# Altium PCB PCB4.PcbDoc
Units mil, origin at the board's own origin, x right, y up, seen from the top; angles counter-clockwise.
Board outline 3935 x 3910 mil, 2 copper layers (Top Layer, Bottom Layer); 36 components, 33 nets, 118 pads, 18 vias.
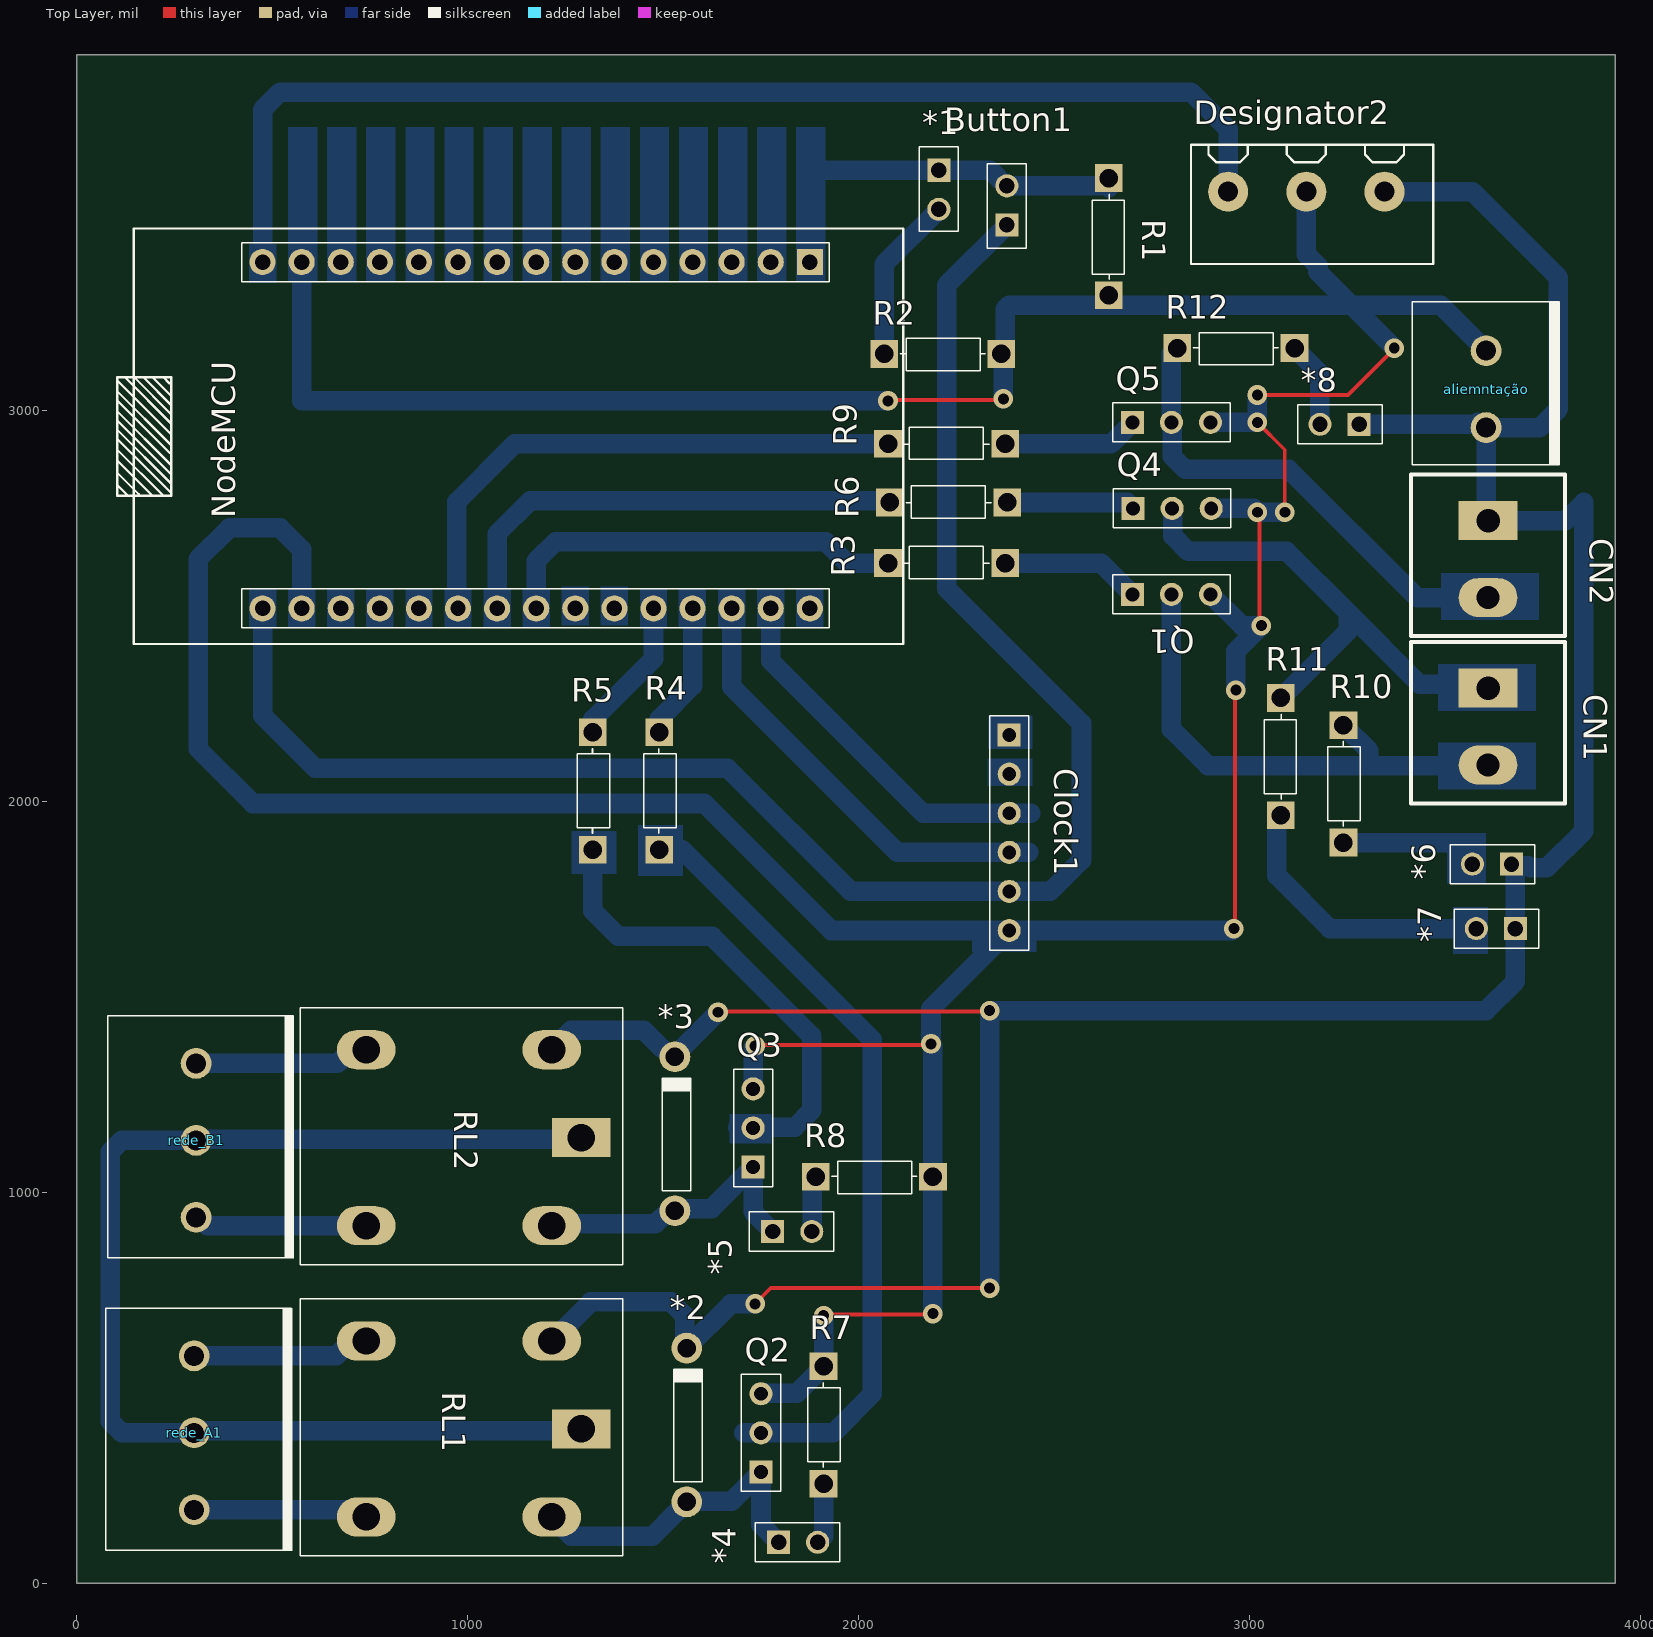
[diagram p0: Top Layer view]
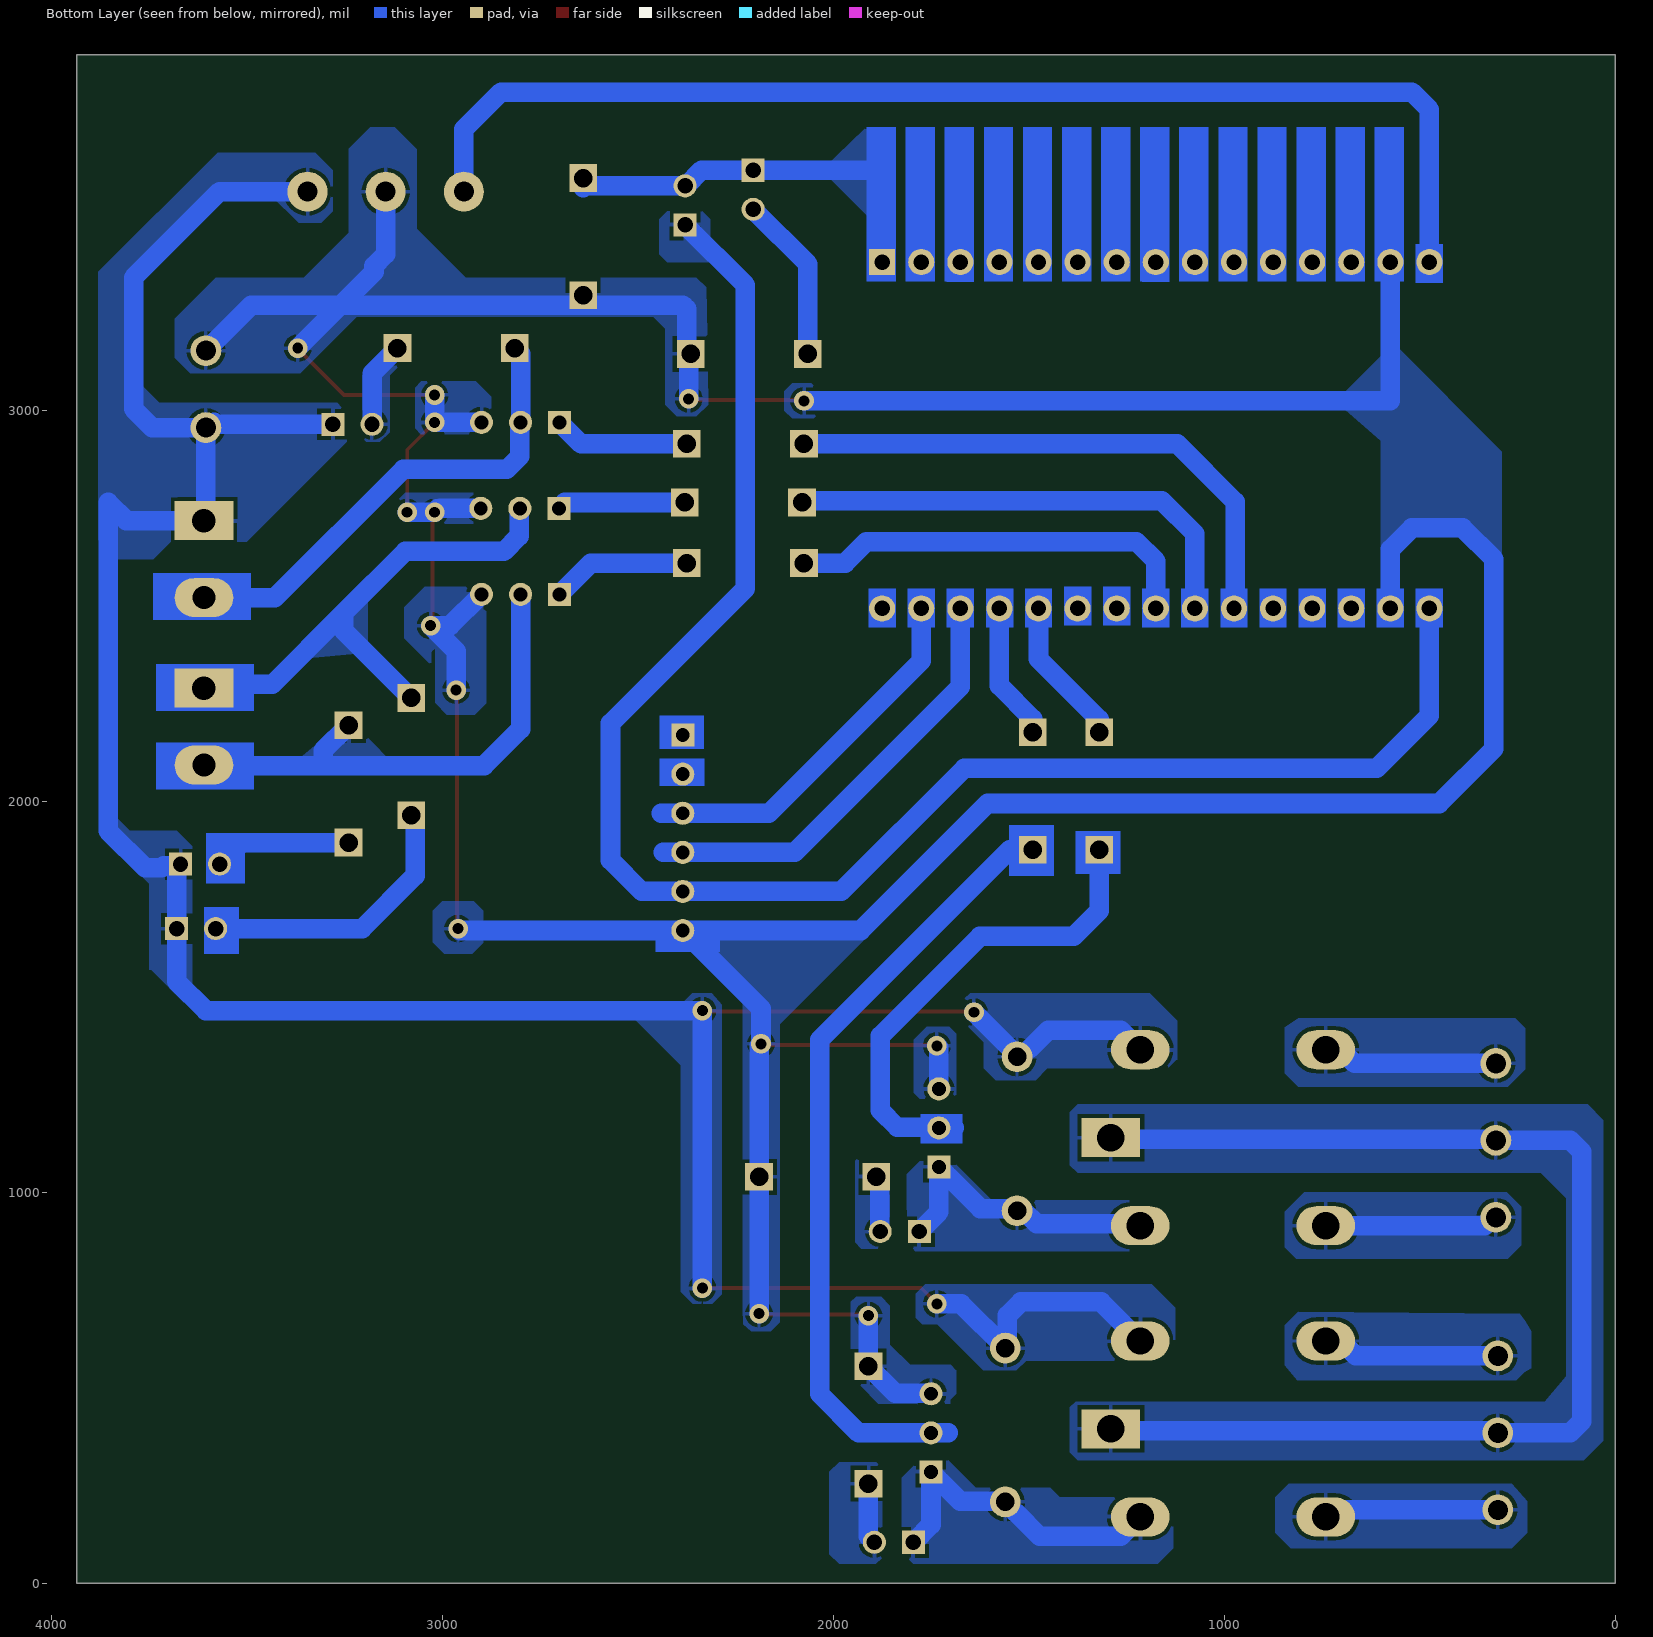
[diagram p1: Bottom Layer view, seen from below]
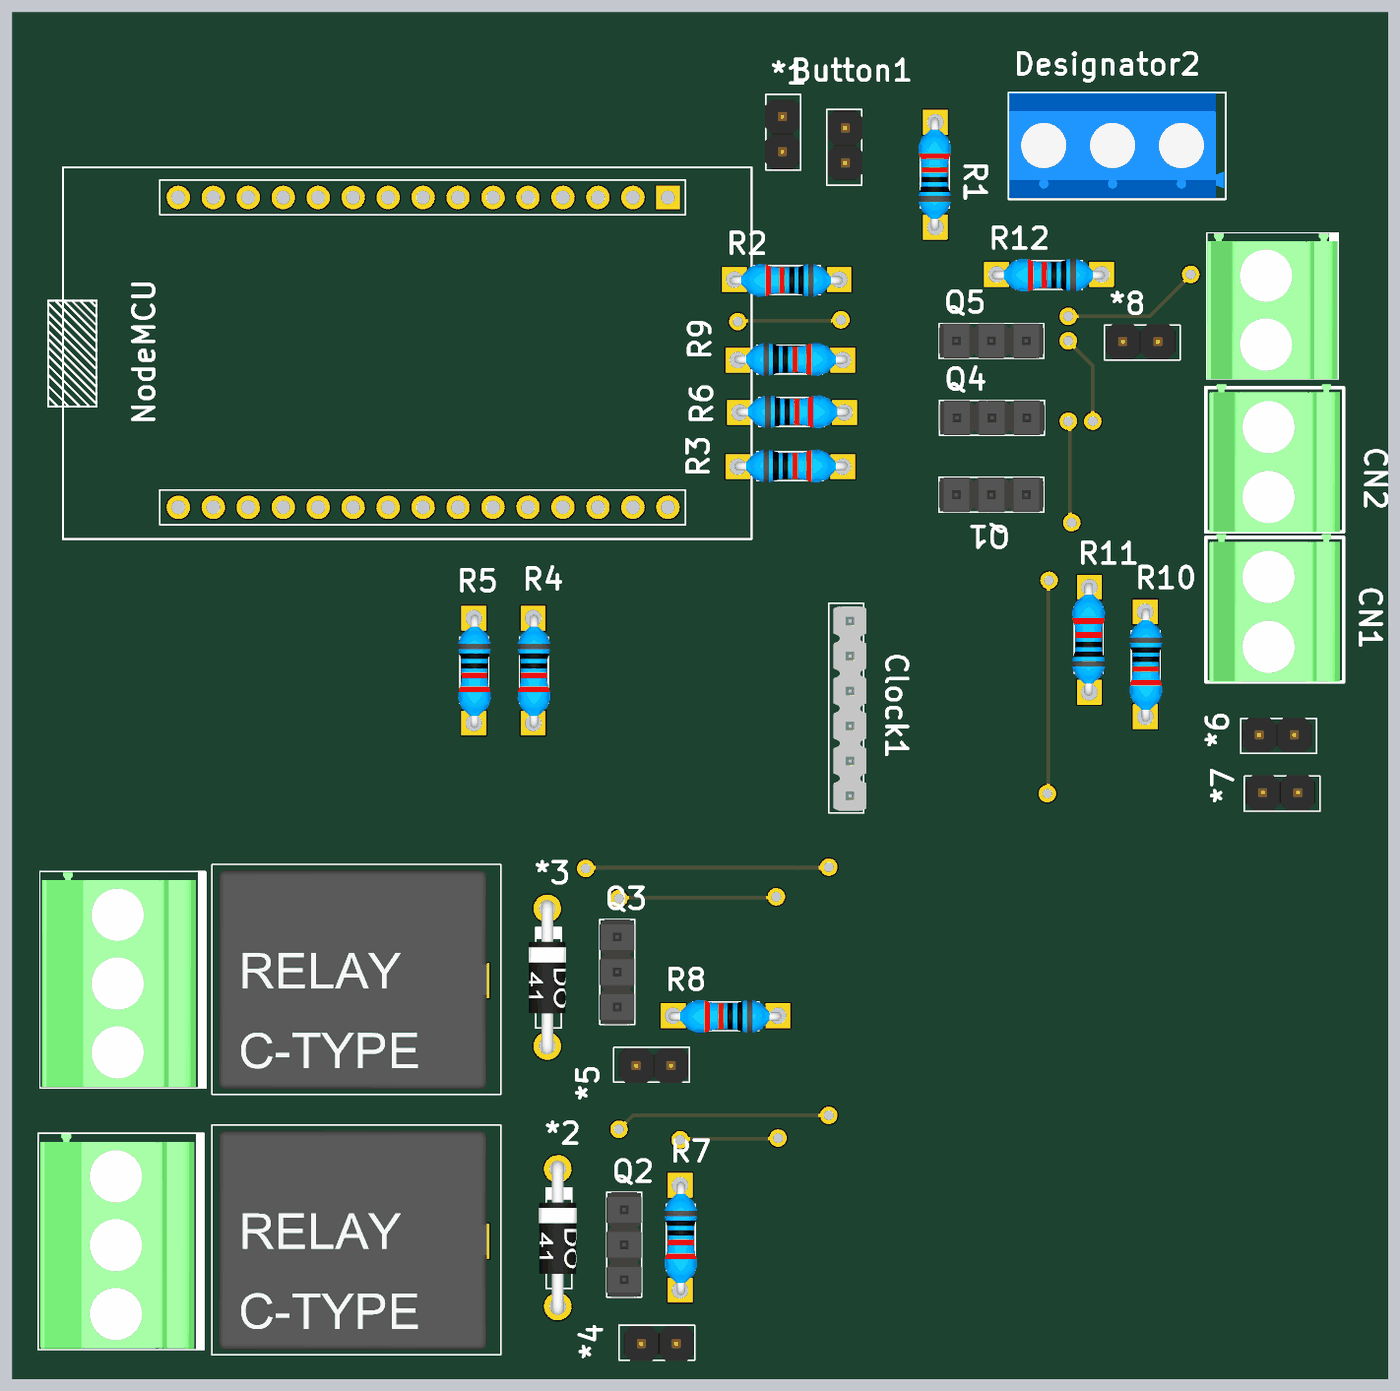
[diagram p2: 3D render of the assembled board from above, using the file's embedded part models]

## Layer stack, top to bottom
Top Solder: solder mask 0.4, Solder Resist, Dk 3.5
Top Layer: signal copper 1.4
Dielectric 1: dielectric 12.6, FR-4, Dk 4.8
Bottom Layer: signal copper 1.4
Bottom Solder: solder mask 0.4, Solder Resist, Dk 3.5

## Board outline
0,0 3935,0 3935,3910 0,3910

## Design rules (kind name [scope] priority, off if disabled: settings)
Clearance [All] p1: gap=10 ignorepadtopadclearanceinfootprint=FALSE except(0: Arc-Hole Track-Hole SMDPad-Hole THPad-Hole Via-Hole Fill-Hole Poly-Hole Region-Hole Text-Hole)
PolygonConnect [All] p1: connectstyle=Relief reliefconductorwidth=10 reliefentries=4 polygonreliefangle="90 Angle" airgapwidth=10
RoutingVias [All] p1: holewidth=28 width=50 viastyle="Through Hole" minholewidth=28 minwidth=50 maxholewidth=28 maxwidth=50
SolderMaskExpansion [All] p1: expansion=4
Width [All] p1: maxlimit=60 minlimit=10 preferedwidth=50 toplayer_maxwidth=10 toplayer_prefwidth=10 bottomlayer_minwidth=45 minimp=50.000000 maximp=50.000000 favimp=50.000000
30 further rules are at their usual default settings.

## Classes and differential pairs
component class "Relógio digital": Clock1
component class "Relay de carga": *2 *3 *4 *5 Q2 Q3 R4 R5 R7 R8 rede_A1 rede_B1 RL1 RL2
component class "Microcontrolador ESP8266": aliemntação NodeMCU
component class "Fita LED": *6 *7 *8 CN1 CN2 Q1 Q4 Q5 R3 R6 R9 R10 R11 R12
component class Botão: *1 Button1 R1 R2

## Components (designator, comment, footprint, x,y, rotation, side; value= is the part's Value field where it differs from the comment)
*1 "LED_AXIAL_5MM" HEADER_1X2 2205,3565 r270 top value=?
*2 "DIO_PTH_1N4007" DIO_PTH_DO41 1560,405 r270 top value=?
*3 "DIO_PTH_1N4007" DIO_PTH_DO41 1530,1150 r270 top value=?
*4 "LED_AXIAL_5MM" HEADER_1X2 1845,105 r0 top value=?
*5 "LED_AXIAL_5MM" HEADER_1X2 1830,900 r0 top value=?
*6 "LED_AXIAL_5MM" HEADER_1X2 3620,1840 r180 top value=?
*7 "LED_AXIAL_5MM" HEADER_1X2 3630,1675 r180 top value=?
*8 "LED_AXIAL_5MM" HEADER_1X2 3230,2965 r180 top value=?
aliemntação "?" CN_KRE_2 3605,3055 r90 top
Button1 "?" HEADER_1X2 2379.14,3525 r90 top
Clock1 "HEADER_1X6" HEADER_1X6 2385,1920 r270 top value=?
CN1 "MKDS" MKDSN02 3610,2191.57 r270 top
CN2 "MKDS" MKDSN02 3610,2620 r270 top
Designator2 "Comment" "KF301 3P" 3145,3560 r180 top
NodeMCU "ESP8266 Development kit" DIV_NodeMCU_Socket 142.57,3470.95 r270 top
Q1 "NPN" HEADER_1X3 2800,2580 r0 top
Q2 "NPN" HEADER_1X3 1700,385 r90 top
Q3 "NPN" HEADER_1X3 1680,1165 r90 top
Q4 "NPN" HEADER_1X3 2801.73,2800 r0 top
Q5 "NPN" HEADER_1X3 2800,3020 r0 top
R1 "1M" RES_PTH_7.62MM 2640,3445 r90 top
R2 "" RES_PTH_7.62MM 2215,3145 r180 top value=330
R3 "10k" RES_PTH_7.62MM 2225,2610 r0 top
R4 "10k" RES_PTH_7.62MM 1490,2026.85 r270 top
R5 "10k" RES_PTH_7.62MM 1320,2026.85 r270 top
R6 "10k" RES_PTH_7.62MM 2230,2765 r0 top
R7 "330" RES_PTH_7.62MM 1910,405 r270 top
R8 "330" RES_PTH_7.62MM 2040,1040 r180 top
R9 "10k" RES_PTH_7.62MM 2225,2915 r0 top
R10 "330" RES_PTH_7.62MM 3240,2045 r270 top
R11 "330" RES_PTH_7.62MM 3080,2115 r90 top
R12 "330" RES_PTH_7.62MM 2965,3160 r180 top
rede_A1 "?" CN_KRE_3 300,385 r90 top
rede_B1 "?" CN_KRE_3 305,1133.15 r90 top
RL1 "RELEICR5551" DIV_RELE_5551 1015,395 r0 top
RL2 "RELEICR5551" DIV_RELE_5551 1015,1140 r0 top

## Footprints (in the part's own frame and the unit in brackets; to place one, negate y for a bottom-side part, rotate by r counter-clockwise, add the part's x,y. Pads: shape width x height; smd on the part's side, far side on the other; paste and mask are expansions set on the pad)
CN_KRE_2 [mm]
  round 2 hole 1.3: 1(-2.5,0) 2(2.5,0)
  silkscreen extent -4.93,-4.75 5.69,4.8, body extent -4.93,-4.7 5.64,4.8, height 15
CN_KRE_3 [mm]
  round 2 hole 1.3: 1(-5,0) 2(0,0) 3(5,0)
  silkscreen extent -7.67,-6.38 8.1,5.74, body extent -7.53,-5.61 8.04,5.59, height 18
DIO_PTH_DO41 [mm]
  round 2 hole 1.2: A(5,0) K(-5,0)
  silkscreen extent -3.62,-0.86 3.69,1.02, body extent -5.65,-1.36 5.71,1.36, height 1.36
DIV_NodeMCU_Socket [mm]
  rect 1.7x1.7 hole 1: 1(2.31,44.004)
  round 1.7 hole 1: 2(2.31,41.464) 3(2.31,38.924) 4(2.31,36.384) 5(2.31,33.844) 6(2.31,31.304) 7(2.31,28.764) 8(2.31,26.224) 9(2.31,23.684) 10(2.31,21.144) 11(2.31,18.604) 12(2.31,16.064) 13(2.31,13.524) 14(2.31,10.984) 15(2.31,8.444) 16(24.816,8.444) 17(24.816,10.984) 18(24.816,13.524) 19(24.816,16.064) 20(24.816,18.604) 21(24.816,21.144) 22(24.816,23.684) 23(24.816,26.224) 24(24.816,28.764) 25(24.816,31.304) 26(24.816,33.844) 27(24.816,36.384) 28(24.816,38.924) 29(24.816,41.464) 30(24.816,44.004)
  silkscreen extent 0.13,-1 27.13,50.08
DIV_RELE_5551 [mil]
  rect 150x100 hole 70: 1(275,0)
  oval 150x100 hole 70: 2(-275,-225) 3(-275,225) 4(200,225) 5(200,-225)
  silkscreen extent -444,-325 382,333, body extent -425,-310 343,316, height 87
HEADER_1X2 [mm]
  rect 1.5x1.5 hole 1: 1(-1.27,0)
  round 1.5 hole 1: 2(1.27,0)
  silkscreen extent -2.79,-1.27 2.71,1.27, body extent -2.44,-1.34 2.64,1.2, height 8.5
HEADER_1X3 [mm] "Connector; Header; 3x2 Position"
  rect 1.5x1.5 hole 0.9: 1(-2.54,-1.27)
  round 1.5 hole 0.9: 2(0,-1.27) 3(2.54,-1.27)
  silkscreen extent -3.81,-2.54 3.81,0, body extent -3.81,-2.54 3.81,0, height 9.5
HEADER_1X6 [mm] "Connector; Header; 6 Position"
  rect 1.5x1.5 hole 0.9: 1(-6.35,0)
  round 1.5 hole 0.9: 2(-3.81,0) 3(-1.27,0) 4(1.27,0) 5(3.81,0) 6(6.35,0)
  silkscreen extent -7.62,-1.27 7.62,1.27, body extent -7.38,-3.55 7.46,1.48, height 8.56
"KF301 3P" [mm] "3 Position Wire to Board Terminal Block Horizontal with Board 0.200\" (5.08mm) Through Hole"
  round 2.6 hole 1.3: 1(-5.08,0) 2(0,0) 3(5.08,0)
  silkscreen extent -8.25,-3.05 7.49,4.7, body extent -8.14,-3 7.46,4.6, height 10
MKDSN02 [mm]
  rect 2.54x3.81 hole 1.524: 1(-2.5,0)
  oval 2.54x3.81 hole 1.5: 2(2.5,0)
  silkscreen extent -5.5,-5 5,5, body extent -5.74,-4.74 5,4.76, height 15
RES_PTH_7.62MM [mm]
  rect 1.8x1.8 hole 1.2: 1(-3.81,0) 2(3.81,0)
  silkscreen extent -2.76,-1.01 2.76,1.09, body extent -4.06,-1.15 4.16,1.25, height 3.2

## Part data
aliemntação: library part CN_MKDS_2, "MKDS_2"
Button1: library part HEADER_1X2, "1X2"
Clock1: "1X6"
CN1 CN2: library part CN_2, Digikey=277-5893-ND
NodeMCU: library part NodeMCU, Reference=https://bennthomsen.files.wordpress.com/2015/12/nodemcu_pinout_700-2.png, Schematic=https://raw.githubusercontent.com/nodemcu/nodemcu-devkit/master/Documents/NODEMCU_DEVKIT_SCH.png
Q1 Q2 Q3 Q4 Q5: "NPN Bipolar Transistor", Code_JEDEC=TO-226-AA, LatestRevisionDate=17-Jul-2002, LatestRevisionNote="Re-released for DXP Platform.", PackageDescription="TO, Flat Index; 3 In-Line, Axial Leads; Body Dia. 4.8mm; Leads 0.55 x 0.51 mm (max)", PackageReference=TO-226-AA, Published=8-Jun-2000, Publisher="Altium Limited"
R1 R2 R3 R4 R5 R6 R7 R8 R9 R10 R11 R12: library part RES_PTH_7.62MM, "Pin Through Hole Resistor 7.62mm"
rede_A1 rede_B1: library part CN_MKDS_3, "MKDS_3"

## Via types
v1: diameter 50, hole 28, Top Layer to Bottom Layer, 18 vias

## Nets (pads, with @x,y where several pads share a name; then routed paths per layer and width w, separated by ;. In a path a pad name is that pad's centre, name@x,y a point inside that pad or via, vN(x,y) a via of type N, cw(c..) or ccw(c..) an arc to the next point about the centre after c; other vN are vias at no path point)
+3v3: Button1.1 Clock1.5 NodeMCU.16 | length 4420.2
  Bottom Layer w50: NodeMCU.16 475,2220 610,2085 1665,2085 1980,1770 Clock1.5 2490,1770 2570,1850 2570,2200 2225,2545 2225,3320.86 Button1.1
+12: *2.K *3.K *6.1 *7.1 *8.1 aliemntação.1 CN2.1 Designator2.1 RL1.4 RL2.4 | length 7882.7
  Top Layer w10: v1(1640,1460.93) 1642.04,1462.96 2332.96,1462.96 v1(2335,1465) ; v1(1735,715) 1775,755 v1(2335,755)
  Bottom Layer w50: RL1.4 1315,720 1520,720 1554.5,685.5 1554.5,607.35 *2.K 1673.15,715 v1(1735,715) ; RL2.4 1265,1415 1450,1415 1496.57,1368.43 ; *3.K 1530,1350.93 v1(1640,1460.93) ; v1(2335,755) v1(2335,1465) 3605,1465 3680,1540 *7.1 3680,1830 *6.1@3674.53,1835.47 ; *8.1 aliemntação.1@3588.8,2965 ; Designator2.1 3570,3560 3790,3340 3790,3004.29 3742.29,2956.57 aliemntação.1 ; aliemntação.1@3583.8,2970 aliemntação.1@3588.8,2965 ; aliemntação.1@3605,2965 aliemntação.1@3588.8,2965 ; *6.1 *6.1@3674.53,1835.47 ; aliemntação.1@3588.8,2965 3597.22,2956.57 aliemntação.1 ; aliemntação.1 3605,2723.43 CN2.1 3808.43,2718.43 3855,2765 3855,1925 3760,1830 3718.58,1830 3713.11,1835.47 *6.1@3674.53,1835.47
GND: aliemntação.2 Clock1.6 Designator2.2 NodeMCU.14 NodeMCU.17 Q1.3 Q2.3 Q3.3 Q4.3 Q5.3 R1.1 R2.1 R7.1 R8.1 | length 12576.6
  Top Layer w10: v1(1735,1375) 1737.5,1377.5 2182.5,1377.5 v1(2185,1380) ; v1(1910,685) 1912.5,687.5 2187.5,687.5 v1(2190,690) ; v1(2075,3025) 2077.5,3027.5 2367.5,3027.5 v1(2370,3030) ; v1(2960,1675) 2962.5,1677.5 2962.5,2282.5 v1(2965,2285) ; v1(3020,2740) 3025,2735 3025,2455 v1(3030,2450) ; v1(3020,2970) 3090,2900 v1(3090,2740) ; v1(3020,3040) 3251.9,3040 3365.32,3153.43 3365.32,3155.32 v1(3370,3160)
  Bottom Layer w45: aliemntação.2@3599.38,3159.04 aliemntação.2
  Bottom Layer w50: NodeMCU.17 575,2645 520,2700 390,2700 310,2620 310,2135 450,1995 1605,1995 1930,1670 Clock1.6 ; 575,3455 NodeMCU.14 575,3025 v1(2075,3025) ; Q3.3 1730,1370 v1(1735,1375) ; Q2.3@1748.27,486.73 Q2.3 1751.73,486.73 1841.73,486.73 R7.1 v1(1910,685) ; v1(2190,690) R8.1 2190,1375 v1(2185,1380) 2185,1470 Clock1.6 ; v1(2370,3030) 2370,3140 R2.1 2375,3155 2375,3260 2385,3270 3260,3270 ; Q1.3 2980,2450 v1(3030,2450) 2965,2385 v1(2965,2285) ; Q5.3 v1(3020,2970) v1(3020,3040) ; Q4.3 3010,2750 v1(3020,2740) v1(3090,2740) ; v1(2960,1675) 2955,1670 Clock1.6 ; Designator2.2 3145,3400 3175,3370 3175,3355 3260,3270 ; v1(3370,3160) 3260,3270 ; aliemntação.2@3599.38,3159.04 3488.43,3270 3260,3270
Net*1_A: *1.1 Button1.2 NodeMCU.1 R1.2 | length 1009.9
  Bottom Layer w50: NodeMCU.1 1875,3600 1890,3615 *1.1 2336.69,3615 2376.69,3575 Button1.2 2635,3575 R1.2@2640,3570
Net*1_K: *1.2 R2.2 | length 435.1
  Bottom Layer w50: R2.2@2060,3150 R2.2 2065,3375 *1.2
Net*2_A: *2.A *4.1 Q2.1 RL1.5 | length 786
  Bottom Layer w50: RL1.5 1265,120 1471.85,120 *2.A@1534.07,182.22 ; *2.A 1561.61,209.76 1674.76,209.76 Q2.1 1750,150 *4.1
Net*3_A: *3.A *5.1 Q3.1 RL2.5 | length 762.8
  Bottom Layer w50: RL2.5 1253.53,915 1258.53,920 1480,920 1513.15,953.15 *3.A 1535.5,958.65 1623.65,958.65 Q3.1 1730,950 *5.1
Net*4_K: *4.2 R7.2 | length 156.2
  Bottom Layer w50: *4.2 1910,120 R7.2
Net*5_K: *5.2 R8.2 | length 144.1
  Bottom Layer w50: *5.2 1881.73,901.73 1881.73,1031.73 R8.2
Net*6_K: *6.2 R10.2 | length 352.8
  Bottom Layer w50: R10.2 3512.55,1895 3567.55,1840 *6.2
Net*7_K: *7.2 R11.1 | length 725.4
  Bottom Layer w50: R11.1 3069.57,1954.57 3069.57,1810.43 3205,1675 *7.2
Net*8_K: *8.2 R12.1 | length 221.9
  Bottom Layer w50: R12.1 3120,3155 3180,3095 *8.2
NetClock1_3: Clock1.3 NodeMCU.29 | length 960.5
  Bottom Layer w50: NodeMCU.29 1775,2360 2165,1970 Clock1.3 2440,1970
NetClock1_4: Clock1.4 NodeMCU.28 | length 1135.6
  Bottom Layer w50: NodeMCU.28 1675,2293.94 2098.94,1870 Clock1.4 2435,1870
NetCN1_1: CN1.1 Q4.2 R11.2 | length 1237.3
  Bottom Layer w50: Q4.2 2803.47,2748.27 2803.47,2679.29 2842.75,2640 3095,2640 3252.5,2482.5 ; R11.2 3252.5,2437.5 3252.5,2482.5 ; 3523.3,2300 3435,2300 3252.5,2482.5
NetCN1_2: CN1.2 Q1.2 R10.1 | length 1335.7
  Bottom Layer w50: Q1.2 2800,2185 2893.43,2091.57 3305,2091.57 ; R10.1@3248.27,2203.27 R10.1 3305,2130 3305,2091.57 ; CN1.2@3610,2091.57 3305,2091.57
NetCN2_2: CN2.2 Q5.2 R12.2 | length 1241.7
  Bottom Layer w50: R12.2 2800,3145 Q5.2 2801.73,2968.27 2801.73,2883.27 2835,2850 3100,2850 3428.43,2521.57 CN2.2
Netesp_VCC_1: Designator2.3 NodeMCU.15 | length 3082.6
  Bottom Layer w50: NodeMCU.15@478.24,3376.76 NodeMCU.15 475,3770 520,3815 2850,3815 2945,3720 Designator2.3
NetNodeMCU_21: NodeMCU.21 R9.1 | length 1438.8
  Bottom Layer w50: NodeMCU.21 971.76,2497.19 971.76,2766.76 1120,2915 R9.1
NetNodeMCU_22: NodeMCU.22 R6.1 | length 1233.3
  Bottom Layer w50: NodeMCU.22 1075,2685 1160,2770 2075,2770 R6.1
NetNodeMCU_23: NodeMCU.23 R3.1 | length 1064.5
  Bottom Layer w50: NodeMCU.23 1175,2615 1225,2665 1915,2665 1970,2610 R3.1
NetNodeMCU_26: NodeMCU.26 R5.1 | length 381.3
  Bottom Layer w50: R5.1 1320,2210 1475,2365 NodeMCU.26
NetNodeMCU_27: NodeMCU.27 R4.1 | length 352.3
  Bottom Layer w50: R4.1 1490,2211.54 1575,2296.54 NodeMCU.27
NetQ1_2: Q1.1 R3.2 | length 358.7
  Bottom Layer w50: R3.2@2375.43,2609.57 R3.2 2620,2610 Q1.1
NetQ2_2: Q2.2 R4.2 | length 2022.8
  Bottom Layer w50: R4.2 1548.47,1876.85 2035,1390.32 2035,485 1935,385 Q2.2 1705.47,385
NetQ3_2: Q3.2 R5.2 | length 1246.9
  Bottom Layer w50: R5.2 1320,1720 1385,1655 1625,1655 1879.43,1400.57 1879.43,1209.75 1836.41,1166.73 1731.73,1166.73 Q3.2 1690.47,1165
NetQ4_2: Q4.1 R6.2 | length 327.9
  Bottom Layer w50: R6.2 2686.73,2765 Q4.1
NetQ5_2: Q5.1 R9.2 | length 347.8
  Bottom Layer w50: R9.2 2645,2915 Q5.1
Netrede_A1_1: rede_A1.1 RL1.2 | length 447.5
  Bottom Layer w50: rede_A1.1 683.32,188.15 701.47,170 RL1.2
Netrede_A1_2: rede_A1.2 rede_B1.2 RL1.1 RL2.1 | length 3130.4
  Bottom Layer w50: RL1.1 1285,390 305,390 rede_A1.2 115,385 85,415 85,1103.86 114.29,1133.15 rede_B1.2 308.43,1136.57 1286.57,1136.57 RL2.1
Netrede_A1_3: rede_A1.3 RL1.3 | length 455.8
  Bottom Layer w50: rede_A1.3 663.32,581.85 701.47,620 RL1.3
Netrede_B1_1: rede_B1.1 RL2.2 | length 443.8
  Bottom Layer w50: rede_B1.1 312.78,936.3 334.08,915 RL2.2
Netrede_B1_3: rede_B1.3 RL2.3 | length 449.5
  Bottom Layer w50: rede_B1.3 666.47,1330 701.47,1365 RL2.3
pads on no net: Clock1.1 Clock1.2 NodeMCU.2 NodeMCU.3 NodeMCU.4 NodeMCU.5 NodeMCU.6 NodeMCU.7 NodeMCU.8 NodeMCU.9 NodeMCU.10 NodeMCU.11 NodeMCU.12 NodeMCU.13 NodeMCU.18 NodeMCU.19 NodeMCU.20 NodeMCU.24 NodeMCU.25 NodeMCU.30

## Polygon pours and split planes (outlines as drawn)
GND on Bottom Layer "Bottom Layer-GND" (solid, remove dead copper, pour order 114): 2890.6,3290.6 3065.04,3465.04 3065.04,3668.07 3121.97,3725 3185,3725 3240,3670 3240,3455 3439.55,3255.45
+12 on Bottom Layer "+12_L02_P112" (solid, pour order 112): 3700,2995.9 3790,3085.9 3790,3340 3580,3550 3437.62,3550 3367.62,3480 3310,3480 3280,3510 3280,3615 3325,3660 3575,3660 3880,3355 3880,2670 3830,2620 3740,2620 3665,2695
no net on Bottom Layer "Bottom Layer-No Net 14" (solid, pour order 108): 3140,3555
Net*1_A on Bottom Layer "NET*1_A_L02_P106" (solid, remove dead copper, pour order 106): 1895,3480 2030,3615 1915,3725
no net on Bottom Layer "Bottom Layer-No Net 15" (solid, pour order 104): 725,3445
no net on Bottom Layer "Bottom Layer-No Net 16" (solid, pour order 102): 620,3640
NetCN1_2 on Bottom Layer "Bottom Layer-NetCN1_2" (solid, pour order 98): 3245,2210 3238.43,2210 3123.43,2095 3385,2095
no net on Bottom Layer "Bottom Layer-No Net 12" (solid, pour order 94): 3155,2085
NetCN1_1 on Bottom Layer "NETCN1_1_L02_P092" (solid, pour order 92): 3190.32,2380 3359.04,2365 3364.04,2370 3190.32,2543.72
+12 on Bottom Layer "+12_L02_P090" (solid, pour order 90): 3640,1505 3640,1885 3680,1925 3800,1925 3840,1965 3875,1930 3875,1915 3750,1790 3750,1570 3745,1570 3685,1510 3674.53,1510
+12 on Bottom Layer "+12_L02_P088" (solid, pour order 88): 2340,1275.32 2526.31,1461.63 2368.37,1461.63
+12 on Bottom Layer "+12_L02_P086" (solid, pour order 86): 3245,2920 3500,2665 3840,2665 3840,2995 3800,3035 3785,3020 3269.1,3020 3245,2995.9
no net on Bottom Layer "Bottom Layer-No Net 13" (solid, pour order 84): 3252.5,3054.96
+3v3 on Bottom Layer "+3V3_L02_P080" (solid, pour order 80): 2315,3490.06 2335,3510.06 2424.94,3510.06 2445,3490 2445,3400 2424.37,3379.37 2315,3379.37
GND on Bottom Layer "GND_L02_P076" (solid, remove dead copper, pour order 76): 2885,2710 3115,2710 3130,2725 3130,2755 3095,2790 2890,2790 2865,2765 2865,2723.43
GND on Bottom Layer "GND_L02_P074" (solid, pour order 74): 2900,2420.86 3000.43,2320.43 3097.5,2417.5 3097.5,2497.5 3045,2550 2900,2550
GND on Bottom Layer "GND_L02_P072" (solid, pour order 72): 2888.36,2251.09 2916.96,2222.5 2988.36,2222.5 3018.36,2252.5 3018.36,2446.64 2888.36,2576.63
GND on Bottom Layer "GND_L02_P070" (solid, pour order 70): 2895,1638.59 2923.59,1610 2995,1610 3025,1640 3025,1720 3000,1745 2920,1745 2895,1720
no net on Bottom Layer "Bottom Layer-No Net" (solid, pour order 64): 1875,3380
GND on Bottom Layer "GND_L02_P062" (solid, remove dead copper, pour order 62): 2875,2970 2875,3035 2915,3075 3054.13,3075 3070,3059.09 3070,2955.07 3054.93,2940 2885,2940
Net*8_K on Bottom Layer "NET*8_K_L02_P060" (solid, pour order 60): 3085,3140 3135,3090 3135,2945 3160,2920 3195,2920 3210,2935 3205,2940 3205,3090 3195,3090
GND on Bottom Layer "GND_L02_P058" (solid, pour order 58): 2025,3039.14 2055.86,3070 2105,3070 2125,3050 2125,3000 2105,2980 2050,2980 2014.58,3015.42
GND on Bottom Layer "GND_L02_P056" (solid, pour order 56): 2319.55,3015.45 2350,2985 2400,2985 2430,3015 2430,3210 2460,3240 3220,3240 3220,3239.04 3364.04,3095 3645,3095 3685,3135 3685,3235 3580,3340 2350,3340 2325,3315
+12 on Bottom Layer "+12_L02_P052" (solid, pour order 52): 2390.55,745.55 2359.96,714.96 2310.04,714.96 2285,740 2285,1479.83 2310.86,1510 2360.55,1510 2390.55,1480
GND on Bottom Layer "GND_L02_P050" (solid, pour order 50): 2230,662.63 2210,644.98 2160.02,644.98 2137.24,667.76 2137.24,1430.03 1917.24,1650.03 1932.24,1665.03 2387.24,1665.03 2387.24,1645.03 2232.24,1490.03 2232.24,705.26
no net on Bottom Layer "Bottom Layer-No Net 1" (solid, pour order 48): 2255,685.5
no net on Bottom Layer "Bottom Layer-No Net 2" (solid, pour order 46): 2135,697.35
GND on Bottom Layer "GND_L02_P044" (solid, remove dead copper, pour order 44): 600,2640 600,2655 600,2922.78 690,3002.78 690,3050 688.43,3050 566.71,3171.71 290,2895 290,2620 310,2620 390,2700 515,2700 530,2685
+12 on Bottom Layer "+12_L02_P042" (solid, pour order 42): 1452.42,1317.11 1482.03,1287.5 1584.9,1287.5 1615,1317.6 1615,1383.7 1665,1433.7 1665,1495 1650,1510 1190,1510 1190,1509.13 1120,1439.13 1120,1340 1122.11,1340 1145,1317.11
Net*4_K on Bottom Layer "NET*4_K_L02_P040" (solid, pour order 40): 1885.81,95 1875,105.81 1875,295 1890,310 1985,310 2010,285 2010,75 1985,50 1890.81,50 1866.33,74.48 1866.33,110.87
Net*5_K on Bottom Layer "NET*5_K_L02_P038" (solid, remove dead copper, pour order 38): 1855,900 1855,876.21 1875.36,855.85 1928.02,855.85 1944.1,871.93 1944.1,1080.86 1934.96,1090 1880.36,1090 1855,1064.64
no net on Bottom Layer "Bottom Layer-No Net 3" (solid, pour order 36): 1860,1060
no net on Bottom Layer "Bottom Layer-No Net 4" (solid, pour order 34): 1860,891.93
GND on Bottom Layer "GND_L02_P032" (solid, pour order 32): 1703.43,1240 1684.83,1249.81 1685.18,1405.88 1703.43,1424.13 1760.87,1424.13 1793.94,1391.06 1793.94,1255.21 1778.73,1240
Net*3_A on Bottom Layer "NET*3_A_L02_P030" (solid, pour order 30): 1810,870 1790,850 1155.87,850 1125,880.87 1125,955.6 1149.4,980 1595,980 1695,1080 1778.73,1080 1811.73,1046.99 1811.73,970
no net on Bottom Layer "Bottom Layer-No Net 5" (solid, pour order 28): 1820,925
no net on Bottom Layer "Bottom Layer-No Net 6" (solid, pour order 26): 1755,1095
GND on Bottom Layer "GND_L02_P024" (solid, pour order 24): 1745,457.5 1742.5,460 1700.9,460 1700.9,469.1 1685,485 1685,545 1686.27,545 1700,558.73 1803.73,558.73 1855,610 1855,710 1877.65,732.65 1940.66,732.65 1955,720 1955,530 1885,460
+12 on Bottom Layer "+12_L02_P022" (solid, pour order 22): 1506.9,570 1531.9,545 1616.5,545 1734.14,662.63 1772.16,662.63 1789.53,680 1789.53,740.47 1765,765 1185,765 1125,705 1125,600 1155,570
Net*2_A on Bottom Layer "NET*2_A_L02_P020" (solid, pour order 20): 1130,190 1130,90 1170,50 1795,50 1825,80 1825,270 1775,320 1710,320 1635,245 1445,245 1420.13,220.13 1160,220.13
no net on Bottom Layer "Bottom Layer-No Net 7" (solid, pour order 18): 1215,220
no net on Bottom Layer "Bottom Layer-No Net 8" (solid, pour order 16): 1215,180
no net on Bottom Layer "Bottom Layer-No Net 9" (solid, pour order 14): 1215,170
Netrede_B1_3 on Bottom Layer "NETREDE_B1_3_L02_P012" (solid, pour order 12): 230,1315 275,1270 810,1270 845,1305 845,1422.41 810.7,1445 255,1445 230,1420
Netrede_B1_1 on Bottom Layer "NETREDE_B1_1_L02_P010" (solid, remove dead copper, pour order 10): 240,963.12 276.88,1000 795,1000 845,950 845,859.87 815.13,830 275,830 240,865
Netrede_A1_3 on Bottom Layer "NETREDE_A1_3_L02_P008" (solid, remove dead copper, pour order 8): 215,550 232.93,540 252.93,520 813.42,520 845,558.09 845,660 810,695 243.97,690 230,670 215,645
no net on Bottom Layer "Bottom Layer-No Net 10" (solid, pour order 6): 300,581.85
Netrede_A1_2 on Bottom Layer "NETREDE_A1_2_L02_P004" (solid, remove dead copper, pour order 4): 1380,465 1395,450 1395,335 1375,315 80,315 30,365 30,1185 70,1225 1375,1225 1395,1205 1395,1070 1375,1050 190,1050 125,985 125,529.17 180,465
Netrede_A1_1 on Bottom Layer "Bottom Layer-Netrede_A1_1" (solid, remove dead copper, pour order 2): 225,210 225,130 265,90 830,90 870,130 870,220 835,255 265,255
no net on Bottom Layer "Bottom Layer-No Net 11" (solid, pour order 0): 300,188.15

## Other copper
Bottom Layer:
  rectangle net Net*1_A: 1840,3330 1915,3725
  rectangle: 1740,3330 1815,3725
  rectangle: 1640,3330 1715,3725
  rectangle: 1540,3330 1615,3725
  rectangle: 1440,3330 1515,3725
  rectangle: 1340,3330 1415,3725
  rectangle: 1240,3330 1315,3725
  rectangle: 1140,3330 1215,3725
  rectangle: 1040,3330 1115,3725
  rectangle: 940,3330 1015,3725
  rectangle: 840,3330 915,3725
  rectangle: 740,3330 815,3725
  rectangle net GND: 540,3330 615,3725
  rectangle: 640,3330 715,3725
  rectangle net Net*6_K: 3505,1790 3605,1920
  rectangle net Net*7_K: 3520,1610 3610,1730
  rectangle net NetCN1_2: 3482.11,2031.25 3732.11,2151.25
  rectangle net NetCN1_1: 3482.11,2231.25 3732.11,2351.25
  rectangle net NetCN2_2: 3490,2465 3740,2585
  rectangle net GND: 540,3331.92 610,3431.92
  rectangle net Netesp_VCC_1: 440,3326.76 510,3426.76
  rectangle: 640,3330 710,3430
  rectangle: 740,3330 810,3430
  rectangle: 840,3330 910,3430
  rectangle: 940,3330 1010,3430
  rectangle: 1040,3330 1110,3430
  rectangle: 1140,3328.82 1210,3428.82
  rectangle: 1240,3331.92 1310,3431.92
  rectangle: 1340,3330 1410,3430
  rectangle: 1440,3330 1510,3430
  rectangle: 1540,3331.92 1610,3431.92
  rectangle: 1640,3328.82 1710,3428.82
  rectangle: 1740,3330 1810,3430
  rectangle: 1840,2445 1910,2545
  rectangle net NetClock1_3: 1740,2445 1810,2545
  rectangle net NetClock1_4: 1640,2445 1710,2545
  rectangle net NetNodeMCU_27: 1539.43,2445 1609.43,2545
  rectangle net NetNodeMCU_26: 1440,2445 1510,2545
  rectangle: 1340,2450 1410,2550
  rectangle: 1240,2450 1310,2550
  rectangle net NetNodeMCU_23: 1140,2445 1210,2545
  rectangle net NetNodeMCU_22: 1040,2445 1110,2545
  rectangle net NetNodeMCU_21: 940,2445 1010,2545
  rectangle net +3v3: 440,2445 510,2545
  rectangle net GND: 540,2445 610,2545
  rectangle: 840,2445 910,2545
  rectangle: 740,2445 810,2545
  rectangle: 640,2445 710,2545
  rectangle: 2330,2040 2445,2110
  rectangle: 2331.3,2135 2445,2220
  rectangle net GND: 2290,1615 2455,1695
  rectangle net NetQ3_2: 1670,1125 1777.4,1200
  rectangle net NetQ3_2: 1265,1815 1380,1925
  rectangle net NetQ2_2: 1435,1810 1550,1940
  region net NetQ2_2: 1490,1876.85

## Silkscreen, mask and mechanical layers (free items; w line width, h text height)
Mechanical 1:
  the board outline again, w10